# Altium PCB PCB2.PcbDoc
Units mm, origin at the board's own origin, x right, y up, seen from the top; angles counter-clockwise.
Board outline 92.97 x 38.97 mm, 2 copper layers (Top Layer, Bottom Layer); 30 components, 31 nets, 101 pads, 1 vias.
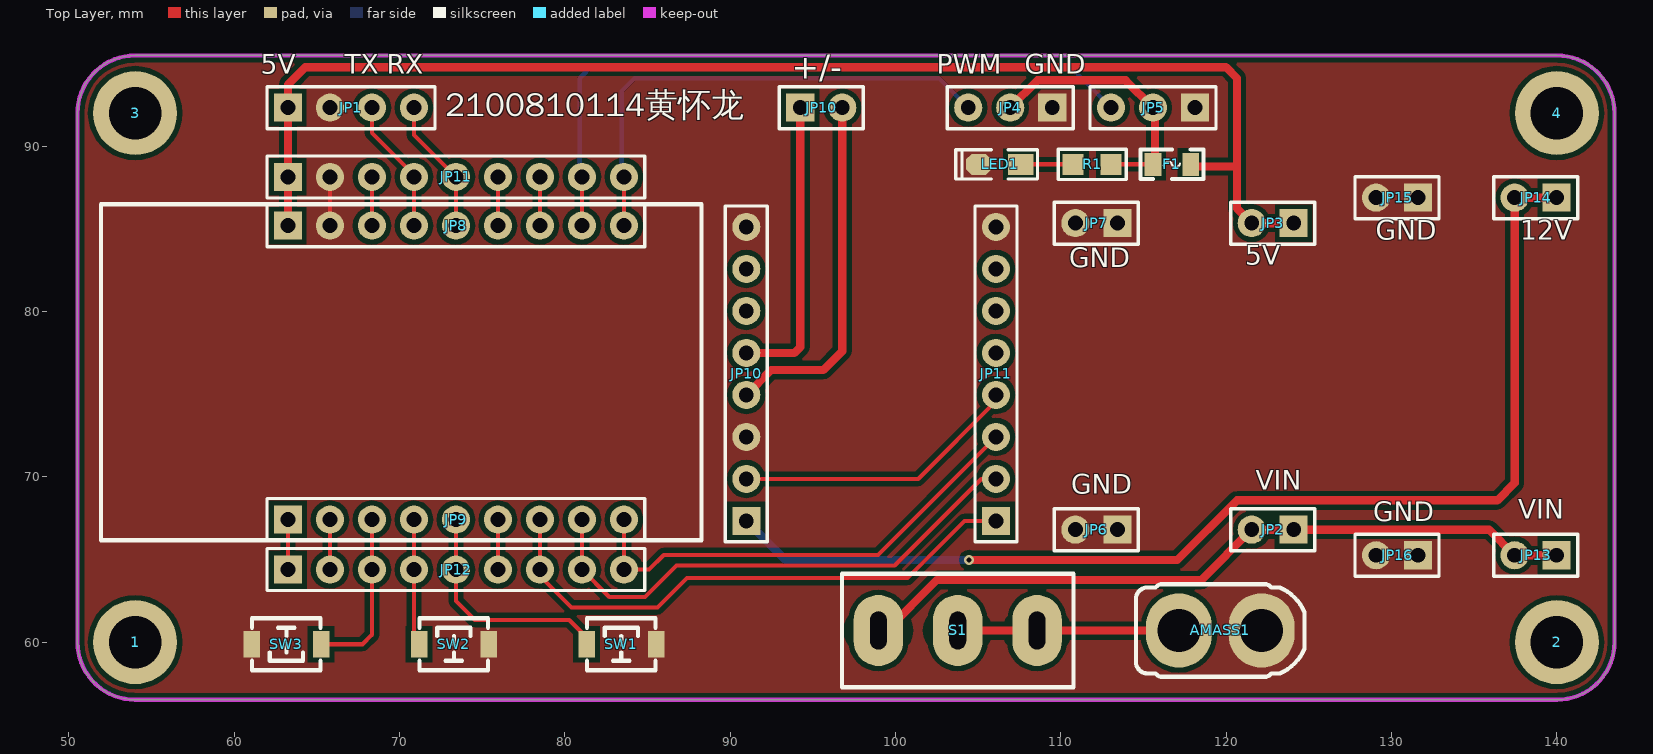
[diagram p0: Top Layer view]
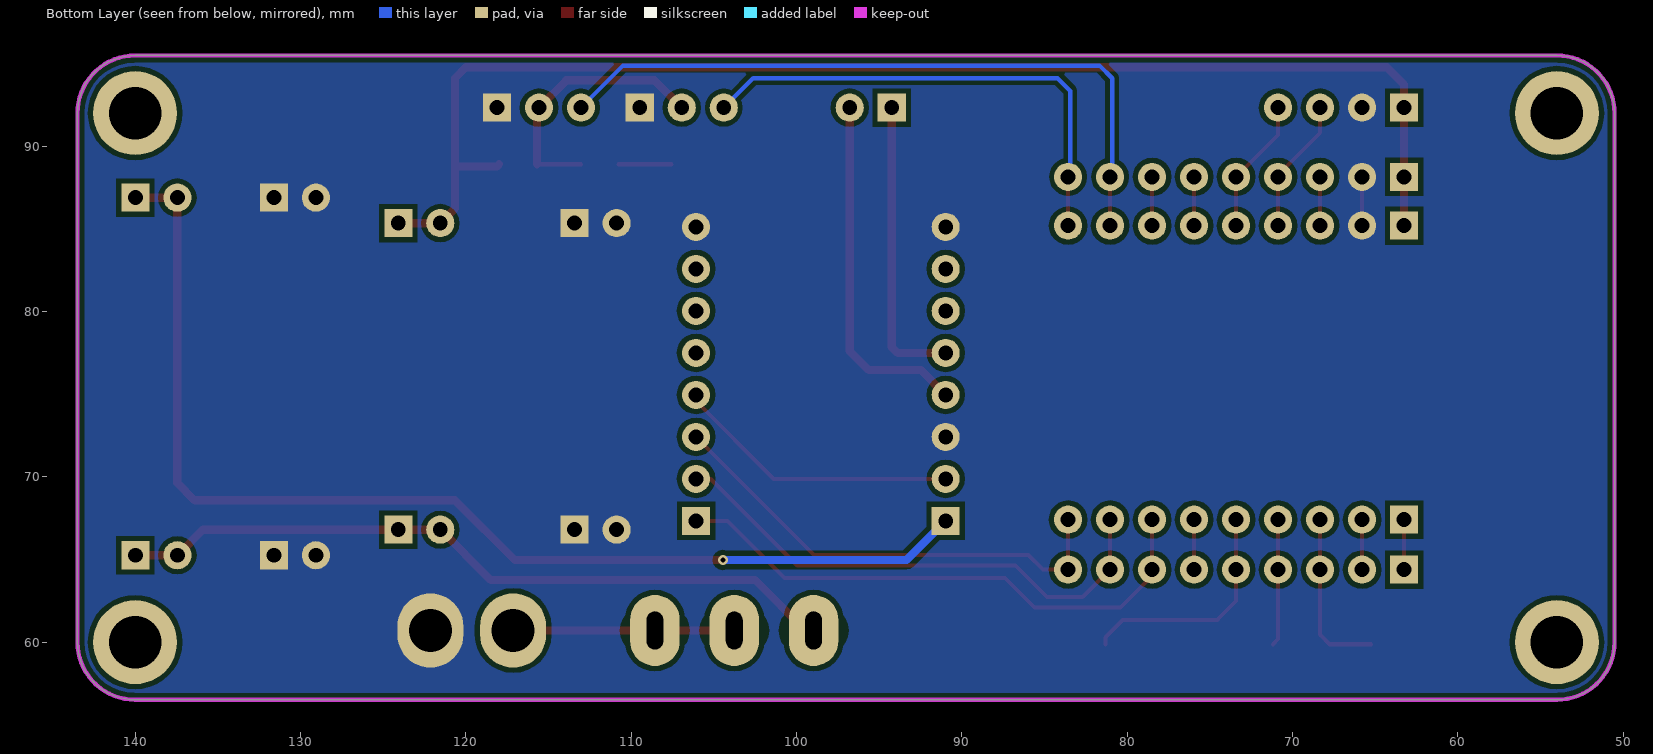
[diagram p1: Bottom Layer view, seen from below]

## Layer stack, top to bottom
Top Solder: solder mask 0.0102, Solder Resist, Dk 3.5
Top Layer: signal copper 0.0356
Dielectric 1: dielectric 0.32, FR-4, Dk 4.8
Bottom Layer: signal copper 0.0356
Bottom Solder: solder mask 0.0102, Solder Resist, Dk 3.5

## Board outline
54,56.514 cw(c54,60) 50.514,60 50.514,92 cw(c54,92) 54,95.486 140,95.486 cw(c140,92) 143.486,92 143.486,60 cw(c140,60) 140,56.514

## Design rules (kind name [scope] priority, off if disabled: settings)
Clearance [All] p1: gap=0.3 ignorepadtopadclearanceinfootprint=TRUE
PlaneConnect [All] p1: planeconnectstyle=Direct reliefexpansion=0.508 reliefentries=4 reliefconductorwidth=0.254 reliefairgap=0.254
PolygonConnect [All] p1: connectstyle=Direct reliefconductorwidth=0.254 reliefentries=4 polygonreliefangle="90 Angle" airgapwidth=0.254
RoutingVias [All] p1: holewidth=0.711 width=1.27 viastyle="Through Hole" minholewidth=0.711 minwidth=1.27 maxholewidth=0.711 maxwidth=1.27
SolderMaskExpansion [All] p1: expansion=0.102
Width [All] p1: maxlimit=10 minlimit=0.254 preferedwidth=0.254 minimp=50.000000 maximp=50.000000 favimp=50.000000
29 further rules are at their usual default settings.

## Classes and differential pairs
component class Sheet3: 1 2 3 4 AMASS1 F1 JP1 JP2 JP3 JP4 JP5 JP6 JP7 JP8 JP9 JP10 JP11 JP12 JP13 JP14 JP15 JP16 LED1 R1 S1 SW1 SW2 SW3

## Components (designator, comment, footprint, x,y, rotation, side; value= is the part's Value field where it differs from the comment)
1 "M3" "M3 125X200" 54,60 r90 top
2 "M3" "M3 125X200" 140,60 r90 top
3 "M3" "M3 125X200" 54,92 r90 top
4 "M3" "M3 125X200" 140,92 r90 top
AMASS1 "XT30x-F" XT30U-M 119.634,60.706 r0 top
F1 "6V/0.35A" "FU 0805" 116.713,88.9 r180 top
JP1 "HDR-1X4" HDR2.54-LI-4P 67.056,92.329 r0 top
JP2 "HDR-1X2" HDR2.54-LI-2P 122.809,66.802 r180 top
JP3 "HDR-1X2" HDR2.54-LI-2P 122.809,85.344 r180 top
JP4 "HDR-1X3" HDR2.54-LI-3P 106.934,92.329 r180 top
JP5 "HDR-1X3" HDR2.54-LI-3P 115.57,92.329 r180 top
JP6 "HDR-1X2" HDR2.54-LI-2P 112.141,66.802 r180 top
JP7 "HDR-1X2" HDR2.54-LI-2P 112.141,85.344 r180 top
JP8 "HDR-1X9" HDR2.54-M-LI-9P 73.406,85.194 r0 top locked
JP9 "HDR-1X9" HDR2.54-M-LI-9P 73.406,67.414 r0 top locked
JP10 "HDR-1X2" HDR2.54-LI-2P 95.504,92.329 r0 top
JP10 "HDR-1X8" HDR2.54-M-LI-8P 90.97,76.223 r90 top locked
JP11 "HDR-1X9" HDR2.54-LI-9P 73.406,88.138 r0 top
JP11 "HDR-1X8" HDR2.54-M-LI-8P 106.07,76.223 r90 top locked
JP12 "HDR-1X9" HDR2.54-LI-9P 73.406,64.389 r0 top
JP13 "HDR-1X2" HDR2.54-LI-2P 138.713,65.254 r180 top
JP14 "HDR-1X2" HDR2.54-LI-2P 138.713,86.884 r180 top
JP15 "HDR-1X2" HDR2.54-LI-2P 130.333,86.884 r180 top
JP16 "HDR-1X2" HDR2.54-LI-2P 130.333,65.254 r180 top
LED1 "Colour" "LED 0805G" 106.299,88.9 r180 top
R1 "1K" "R 0805_M" 111.887,88.9 r0 top
S1 "SS-12F23" SS-12D10 103.759,60.706 r180 top
SW1 "6x6x5" "TSW SMD-3*4*2" 83.41,59.873 r0 top
SW2 "6x6x5" "TSW SMD-3*4*2" 73.279,59.873 r0 top
SW3 "6x6x5" "TSW SMD-3*4*2" 63.148,59.873 r180 top

## Footprints (in the part's own frame and the unit in brackets; to place one, negate y for a bottom-side part, rotate by r counter-clockwise, add the part's x,y. Pads: shape width x height; smd on the part's side, far side on the other; paste and mask are expansions set on the pad)
"FU 0805" [mil] "贴片保险丝"
  rect 40x55 smd: 1(-45,0) 2(45,0)
  silkscreen extent -75,-35 75,35, body extent -39,-24 39,24, height 20
HDR2.54-LI-2P [mm] "排针，2脚"
  rect 1.7x1.7 hole 0.9: 1(-1.27,0)
  round 1.7 hole 0.9: 2(1.27,0)
  silkscreen extent -2.54,-1.27 2.54,1.27, body extent -2.54,-1.27 2.54,1.27, height 8.5
HDR2.54-LI-3P [mm] "排针，3脚"
  rect 1.7x1.7 hole 0.9: 1(-2.54,0)
  round 1.7 hole 0.9: 2(0,0) 3(2.54,0)
  silkscreen extent -3.81,-1.27 3.81,1.27, body extent -3.81,-1.27 3.81,1.27, height 8.5
HDR2.54-LI-4P [mm] "排针，4脚"
  rect 1.7x1.7 hole 0.9: 1(-3.81,0)
  round 1.7 hole 0.9: 2(-1.27,0) 3(1.27,0) 4(3.81,0)
  silkscreen extent -5.08,-1.27 5.08,1.27, body extent -5.08,-1.27 5.08,1.27, height 8.5
HDR2.54-LI-9P [mm] "排针，9脚"
  rect 1.7x1.7 hole 0.9: 1(-10.16,0)
  round 1.7 hole 0.9: 2(-7.62,0) 3(-5.08,0) 4(-2.54,0) 5(0,0) 6(2.54,0) 7(5.08,0) 8(7.62,0) 9(10.16,0)
  silkscreen extent -11.43,-1.27 11.43,1.27, body extent -11.43,-1.27 11.43,1.27, height 8.5
HDR2.54-M-LI-8P [mm] "排母，8脚"
  rect 1.7x1.7 hole 0.9: 1(-8.89,0)
  round 1.7 hole 0.9: 2(-6.35,0) 3(-3.81,0) 4(-1.27,0) 5(1.27,0) 6(3.81,0) 7(6.35,0) 8(8.89,0)
  silkscreen extent -10.16,-1.27 10.16,1.27, body extent -10.16,-1.27 10.16,1.27, height 8.5
HDR2.54-M-LI-9P [mm] "排母，9脚"
  rect 1.7x1.7 hole 0.9: 1(-10.16,0)
  round 1.7 hole 0.9: 2(-7.62,0) 3(-5.08,0) 4(-2.54,0) 5(0,0) 6(2.54,0) 7(5.08,0) 8(7.62,0) 9(10.16,0)
  silkscreen extent -11.43,-1.27 11.43,1.27, body extent -11.43,-1.27 11.43,1.27, height 8.5
"LED 0805G" [mil] "绿色0805LED"
  rect 60x50 smd: 1(-50,0)
  oct 60x50 smd: 2(50,0)
  silkscreen extent -90,-35 105,35, body extent -39,-25 39,25, height 32
"M3 125X200" [mm] "M3螺丝孔，孔125Mil，焊盘200Mil"
  round 5.08 hole 3.175: 1(0,0)
"R 0805_M" [mil] "1/8W贴片电阻"
  rect 50x50 smd: 1(-45,0) 2(45,0)
  silkscreen extent -81,-36 81,36, body extent -39,-25 39,25, height 20
SS-12D10 [mm] "脚距4.8mm"
  oval 3x4.3 hole 2.3 slot 1 at 0 deg: 1(-4.8,0) 2(0,0) 3(4.8,0)
  silkscreen extent -7,-3.43 7,3.43, body extent -6.71,-3.3 6.71,3.3, height 11.8
"TSW SMD-3*4*2" [mm] "3*4*2mm"
  rect 1x1.6 smd: 1(-2.1,0) 2(2.1,0)
  silkscreen extent -2.08,-1.58 2.08,1.58, body extent -2.45,-1.45 2.45,1.45, height 2
XT30U-M [mm] "长：10.2mm，宽：5.2mm，高：10.7mm"
  oval 4x4.5 hole 2.6: 1(-2.5,0) 2(2.5,0)
  silkscreen extent -5.1,-2.8 5.1,2.8, body extent -5.1,-2.8 5.1,2.8, height 10.71

## Part data
1 2 3 4: "铜柱孔"
AMASS1: library part XT30, "Amass防打火电源接口，XT30系列"
F1: library part FU, "贴片保险丝", BOM名称=贴片, 学习资源=www.ooocke.
JP1: library part "Header 4", "4P接插件", BOM名称=4P接插件, 学习资源=www.ooocke.com, 版权归属=源创客
JP2 JP3 JP6 JP7 JP10 JP13 JP14 JP15 JP16: library part "Header 2", "2P接插件", BOM名称=2P接插件, 学习资源=www.ooocke.com, 版权归属=源创客
JP4 JP5: library part "Header 3", "3P接插件", BOM名称=3P接插件, 学习资源=www.ooocke.com, 版权归属=源创客
JP8 JP9 JP11 JP12: library part "Header 9", "9P接插件"
  JP8 JP9: BOM名称=9P接插件, 学习资源=www.ooocke.com, 版权归属=源创客
  JP11 JP12: BOM名称=9P接, 学习资源=www.ooocke.
JP10 JP11: library part "Header 8", "8P接插件", BOM名称=8P接插件, 学习资源=www.ooocke.com, 版权归属=源创客
LED1: library part LED-SMD, "贴片LED", BOM名称=贴片, 学习资源=www.ooocke.
R1: library part R, "贴片电阻", BOM名称=ÌùÆ, 学习资源=www.ooocke.
S1: library part SSW-1P, "1路拨动开关", BOM名称=波动开关, 学习资源=www.ooocke.com, 版权归属=源创客
SW1 SW2 SW3: library part "TSW SMD-6x6", "贴片6x6轻触开关", BOM名称=贴片6x6轻触开关, 学习资源=www.ooocke.com, 版权归属=源创客

## Via types
v1: diameter 0.61, hole 0.305, Top Layer to Bottom Layer, 1 vias

## Nets (pads, with @x,y where several pads share a name; then routed paths per layer and width w, separated by ;. In a path a pad name is that pad's centre, name@x,y a point inside that pad or via, vN(x,y) a via of type N, cw(c..) or ccw(c..) an arc to the next point about the centre after c; other vN are vias at no path point)
2S_VIN: JP2.1 JP2.2 JP13.1 JP13.2 S1.3 | length 44.2
  Top Layer w0.5: S1.3 99.441,60.706 102.489,63.754 118.491,63.754 JP2.2 JP2.1 135.895,66.802 JP13.2 JP13.1
3V3: JP10.2@90.97,69.873 JP11.4@106.07,74.953 | length 17.4
  Top Layer w0.254: JP10.2@90.97,69.873 101.369,69.873 106.07,74.574 JP11.4@106.07,74.953
3V3_CORE: JP8.3 JP11.3@68.326,88.138 | length 2.9
  Top Layer w0.254: JP8.3 JP11.3@68.326,88.138
5V: F1.1 JP1.1 JP3.1 JP3.2 JP8.1 JP11.1@63.246,88.138 | length 81
  Top Layer w0.5: JP8.1 63.246,88.138 JP1.1 63.246,93.726 64.3,94.78 119.977,94.78 120.65,94.107 120.65,88.773 ; F1.1@117.983,88.9 118.11,88.773 120.65,88.773 ; JP3.1 JP3.2 120.65,86.233 120.65,88.773
5V_POWER: F1.2 JP4.2 JP5.2 R1.2 | length 16
  Top Layer w0.254: R1.2 F1.2
  Top Layer w0.5: JP4.2 108.585,93.98 113.919,93.98 JP5.2 115.697,92.202 F1.2@115.697,88.9
12V: JP10.1@90.97,67.333 JP14.1 JP14.2 | length 69.2
  Top Layer w0.5: v1(104.452,64.966) 117.036,64.966 120.65,68.58 136.398,68.58 137.443,69.625 JP14.2 JP14.1
  Bottom Layer w0.5: JP10.1@90.97,67.333 93.337,64.966 v1(104.452,64.966)
AIN1: JP9.9 JP11.3@106.07,72.413 JP12.9 | length 28.9
  Top Layer w0.254: JP9.9 JP12.9 85.09,64.389 85.979,65.278 98.935,65.278 JP11.3@106.07,72.413
AO1: JP10.2@96.774,92.329 JP10.4 | length 21.6
  Top Layer w0.5: JP10.4 92.471,76.454 95.631,76.454 96.774,77.597 JP10.2@96.774,92.329
AO2: JP10.1@94.234,92.329 JP10.5 | length 17.9
  Top Layer w0.5: JP10.5 93.876,77.493 94.234,77.851 JP10.1@94.234,92.329
BIN1: JP11.5@106.07,77.493
BO1: JP10.7
BO2: JP10.6
DIR_A: JP9.8 JP11.2@106.07,69.873 JP12.8 | length 31.7
  Top Layer w0.254: JP9.8 JP12.8 82.677,62.738 84.836,62.738 86.741,64.643 99.949,64.643 105.179,69.873 JP11.2@106.07,69.873
DIR_B: JP11.6@106.07,80.033
GND: AMASS1.2 JP1.2 JP4.1 JP5.1 JP6.1 JP6.2 JP7.1 JP7.2 JP8.2 JP10.3 JP10.8 JP11.2@65.786,88.138 JP11.8@106.07,85.113 JP15.1 JP15.2 JP16.1 JP16.2 LED1.2 SW1.2 SW2.2 SW3.2 | length 2.9
  Top Layer w0.254: JP8.2 JP11.2@65.786,88.138
GP0: JP1.3 JP8.4 JP11.4@70.866,88.138 | length 8.2
  Top Layer w0.254: JP1.3 68.326,90.805 70.866,88.265 70.866,88.138 JP8.4
GP1: JP1.4 JP8.5 JP11.5@73.406,88.138 | length 8.2
  Top Layer w0.254: JP1.4 70.866,90.678 73.406,88.138 JP8.5
GP2: JP8.6 JP11.6@75.946,88.138 | length 2.9
  Top Layer w0.254: JP8.6 JP11.6@75.946,88.138
GP3: JP8.7 JP11.7@78.486,88.138 | length 2.9
  Top Layer w0.254: JP8.7 JP11.7@78.486,88.138
GP4: JP5.3 JP8.8 JP11.8@81.026,88.138 | length 42.4
  Top Layer w0.254: JP8.8 JP11.8@81.026,88.138
  Bottom Layer w0.254: JP11.8@80.899,88.138 80.899,94.107 81.661,94.869 110.49,94.869 JP5.3
GP5: JP4.3 JP8.9 JP11.9 | length 30.2
  Top Layer w0.254: JP8.9 JP11.9
  Bottom Layer w0.254: JP11.9@83.439,88.138 83.439,93.345 84.201,94.107 102.616,94.107 JP4.3
GP12: JP9.4 JP12.4 SW2.1 | length 7.7
  Top Layer w0.254: JP9.4 JP12.4 70.866,60.186 SW2.1
GP13: JP9.3 JP12.3 SW3.1 | length 10.3
  Top Layer w0.254: SW3.1 67.747,59.873 68.326,60.452 JP12.3 JP9.3
GP19: JP9.7 JP11.1@106.07,67.333 JP12.7 | length 33.9
  Top Layer w0.254: JP9.7 JP12.7 78.486,64.008 80.391,62.103 85.598,62.103 87.376,63.881 100.711,63.881 104.163,67.333 JP11.1@106.07,67.333
GP20: JP9.6 JP12.6 | length 3
  Top Layer w0.254: JP12.6 JP9.6
GP23: JP9.5 JP12.5 SW1.1 | length 14.2
  Top Layer w0.254: JP9.5 JP12.5 73.406,62.484 74.549,61.341 80.264,61.341 81.309,60.296 SW1.1
NetLED1_1: LED1.1 R1.1 | length 3.2
  Top Layer w0.254: LED1.1 R1.1
PWMB: JP11.7@106.07,82.573
UART0_RX: JP9.2 JP12.2 | length 3
  Top Layer w0.254: JP12.2 JP9.2
UART0_TX: JP9.1 JP12.1 | length 3
  Top Layer w0.254: JP12.1 JP9.1
VIN: AMASS1.1 S1.1 S1.2 | length 13.4
  Top Layer w0.5: S1.2 S1.1 AMASS1.1
pads on no net: 1.1 2.1 3.1 4.1

## Polygon pours and split planes (outlines as drawn)
GND on Top Layer "Top Layer-No Net" (solid, pour order 2): 54,56.514 cw(c54,60) 50.514,60 50.514,92 cw(c54,92) 54,95.486 140,95.486 cw(c140,92) 143.486,92 143.486,60 cw(c140,60) 140,56.514
GND on Bottom Layer "Top Layer-No Net1" (solid, pour order 3): 54,56.514 cw(c54,60) 50.514,60 50.514,92 cw(c54,92) 54,95.486 140,95.486 cw(c140,92) 143.486,92 143.486,60 cw(c140,60) 140,56.514

## Keep-outs
Keep-Out Layer:
  the board outline again, w0.254

## Silkscreen, mask and mechanical layers (free items; w line width, h text height)
Top Overlay:
  lines w0.254: 51.936,66.167 88.265,66.167 88.265,86.487 51.936,86.487 51.936,66.167
  text "5V" at 61.595,93.98 h2
  text "TX" at 66.675,93.98 h2
  text "RX" at 69.215,93.98 h2
  text "PWM" at 102.489,93.98 h2
  text "GND" at 107.823,93.98 h2
  text "+/-" at 93.726,93.599 h2.5
  text "2100810114黄怀龙" at 72.771,91.313 h2.5
  text "GND" at 129.032,83.947 h2
  text "12V" at 137.795,83.947 h2
  text "5V" at 121.158,82.423 h2
  text "GND" at 110.49,82.296 h2
  text "VIN" at 121.793,68.834 h2
  text "GND" at 110.617,68.58 h2
  text "VIN" at 137.668,67.056 h2
  text "GND" at 128.905,66.929 h2